# Altium PCB PCB1.PcbDoc (part 3 of 3)
Units mil, origin at the board's own origin, x right, y up, seen from the top; angles counter-clockwise.
Board outline 970.61 x 1495 mil, 4 copper layers (Top Layer, Mid-Layer 1, Mid-Layer 2, Bottom Layer); 18 components, 0 nets, 96 pads, 58 vias.
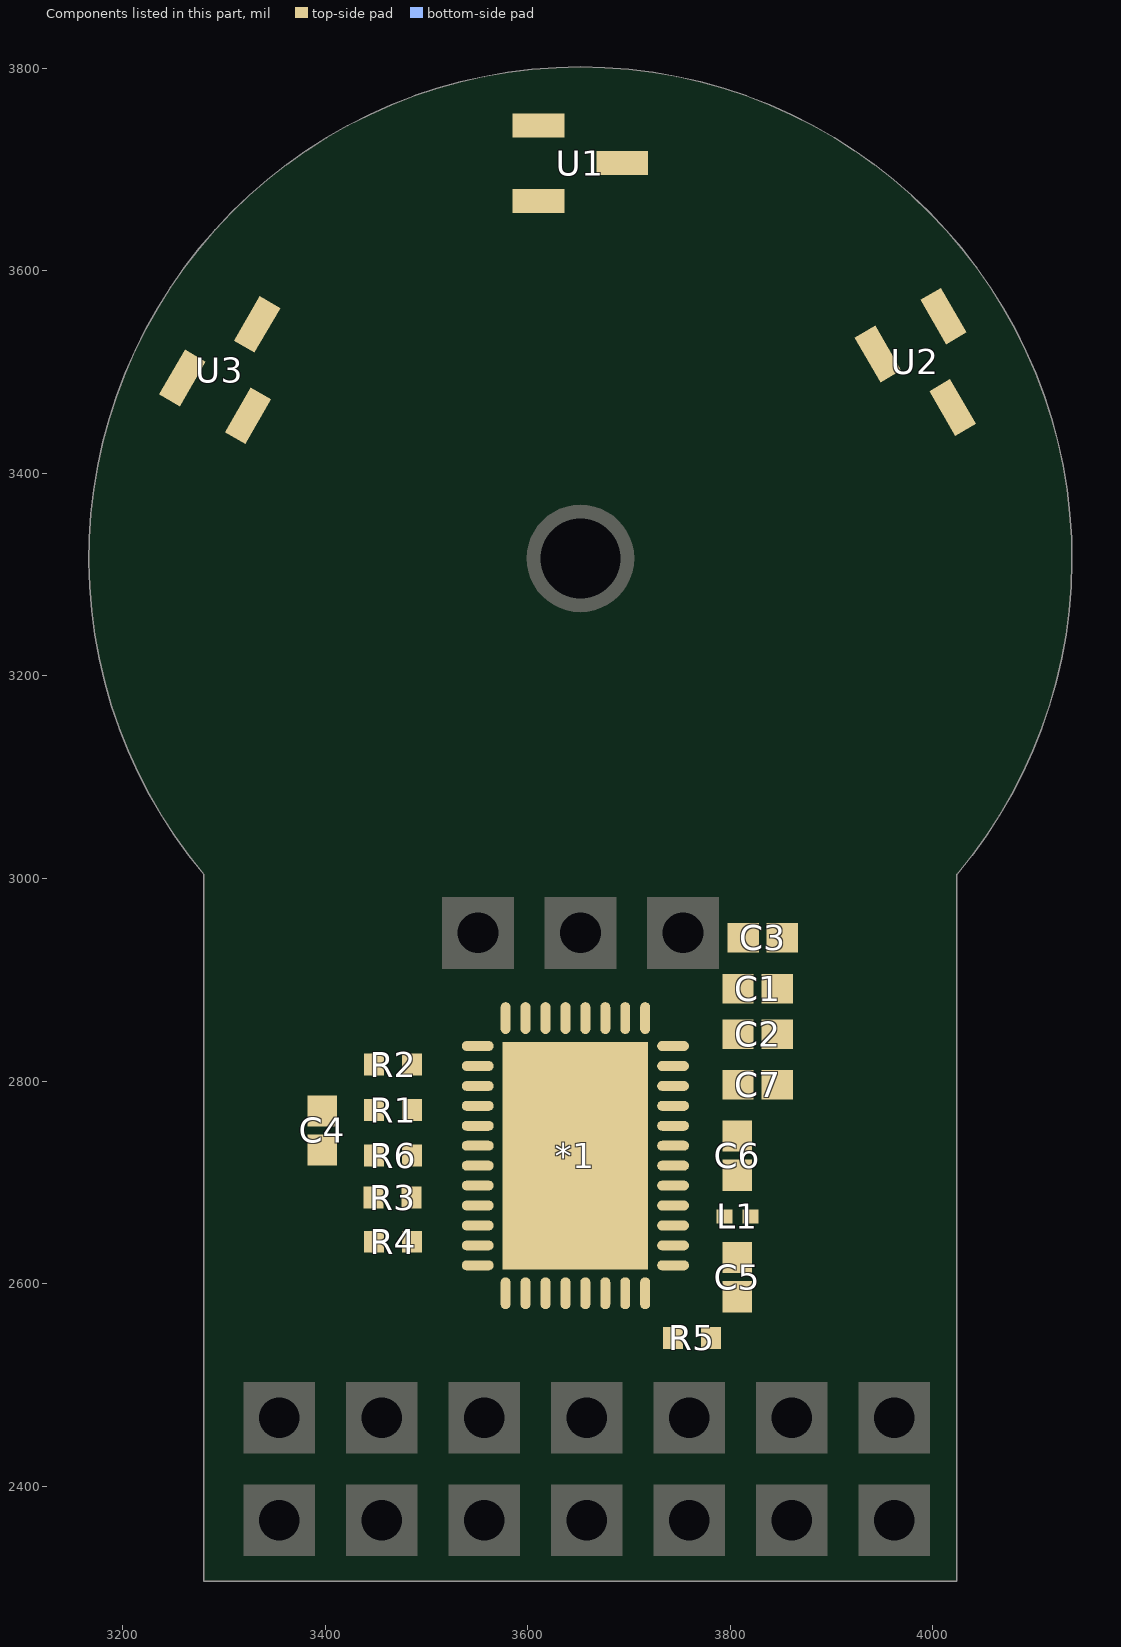
[diagram p5: the components of this part, seen from the top]

## Via types
v1: diameter 15.75, hole 7.87, Top Layer to Bottom Layer, tented both sides, 24 vias
v2: diameter 23.62, hole 11.81, Top Layer to Bottom Layer, tented both sides, 19 vias
v3: diameter 19.68, hole 7.87, Top Layer to Bottom Layer, 15 vias

## Nets (pads, with @x,y where several pads share a name; then routed paths per layer and width w, separated by ;. In a path a pad name is that pad's centre, name@x,y a point inside that pad or via, vN(x,y) a via of type N, cw(c..) or ccw(c..) an arc to the next point about the centre after c; other vN are vias at no path point) (continued)
copper on no net: (continued)
  Mid-Layer 2 w3.94: 3383.65,3202.05 3384.2,3201.32 ; 3384.79,3200 cw(c3461.5,3235.4) 3384.2,3201.32 ; v1(3412.78,3314.17) 3401.3,3294.68 ccw(c3461.5,3235.4) 3384.2,3201.32 ; 3437.71,3476.37 3413.59,3419.15 ccw(c3461.5,3396.51) 3461.5,3343.51 3513.78,3343.51 ccw(c3511.75,3393.62) 3556.55,3371.07 cw(c3652.01,3315.95) 3558.58,3374.45 ccw(c3514.62,3398.59) 3559.03,3421.88 3532.89,3467.16 ccw(c3487,3440.67) 3443.43,3470.84 3421.16,3416.72 ccw(c3461.5,3396.51) 3461.5,3351.39 3511.75,3351.39 ccw(c3511.75,3393.62) 3548.22,3372.32 ; 3437.71,3476.38 cw(c3487,3440.67) 3539.71,3471.1 3565.77,3425.96 cw(c3514.62,3398.59) 3565.25,3370.27 ccw(c3652.01,3315.95) 3563.37,3367.14 ; 3449.32,3166.42 3413.59,3212.76 cw(c3461.5,3235.4) 3461.5,3288.4 3513.78,3288.4 cw(c3511.75,3238.28) 3554.64,3264.29 ccw(c3652.01,3315.95) 3556.55,3260.84 cw(c3514.62,3233.32) 3559.03,3210.02 3532.89,3164.75 cw(c3487,3191.24) 3443.43,3161.07 3405.93,3210.57 cw(c3461.5,3235.4) 3461.5,3296.27 3513.62,3296.27 cw(c3511.75,3238.28) 3561.59,3267.98 ccw(c3652.01,3315.95) 3563.36,3264.77 ; 3449.33,3166.42 ccw(c3487,3191.24) 3526.07,3168.68 3551.2,3212.2 ccw(c3514.62,3233.32) 3551.3,3254.25 ; v1(3478.24,3417.41) 3482.32,3444.01 ; 3482.48,3444.22 cw(c3487,3440.67) 3491.98,3443.54 3517.1,3400.02 cw(c3514.62,3398.59) 3517.08,3397.12 ; v1(3498.58,3227.37) 3503.63,3208.55 3491.98,3188.37 cw(c3487,3191.24) 3482.48,3187.69 3482.15,3188.11 3449.17,3229.61 cw(c3461.5,3235.4) 3461.5,3249.03 3511.75,3249.03 cw(c3511.75,3238.28) 3520.87,3243.96 ; 3514.39,3392.5 cw(c3511.75,3393.62) 3514.26,3392.25 ; 3516.91,3396.87 ccw(c3514.62,3398.59) 3517.08,3397.12 ; 3519.12,3459.52 3544.38,3415.77 cw(c3514.62,3398.59) 3543.59,3380.11 ; 3519.12,3459.53 ccw(c3487,3440.67) 3455.91,3461.18 3435.23,3409.64 ccw(c3461.5,3396.51) 3461.5,3367.14 3511.75,3367.14 ccw(c3511.75,3393.62) 3534.52,3380.08 ; 3521.4,3243 ccw(c3511.75,3238.28) 3520.87,3243.96 ; 3521.4,3388.91 cw(c3511.75,3393.62) 3520.87,3387.95 ; 3523.53,3239.32 cw(c3514.62,3233.32) 3524.09,3238.37 cw(c3514.62,3233.32) 3523.92,3227.95 3498.8,3184.43 cw(c3487,3191.24) 3475.82,3183.46 3442.35,3225.5 cw(c3461.5,3235.4) 3463.21,3256.9 3511.75,3256.9 cw(c3511.75,3238.28) 3527.68,3247.91 ; 3523.53,3392.59 ccw(c3514.62,3398.59) 3524.09,3393.53 ; 3524.09,3238.38 cw(c3652.01,3315.95) 3522.45,3241.15 cw(c3652.01,3315.95) 3520.87,3243.96 ; v1@3525.83,3104.91 cw(c3505.36,3061.94) 3545.07,3088.19 ; 3528.36,3246.68 ccw(c3511.75,3238.28) 3527.68,3247.91 ; 3528.36,3385.23 cw(c3511.75,3393.62) 3527.68,3383.99 ; 3530.19,3243.51 cw(c3514.62,3233.32) 3530.92,3242.3 ; 3530.19,3388.4 ccw(c3514.62,3398.59) 3530.92,3389.61 ; 3535.31,3250.39 ccw(c3511.75,3238.28) 3534.52,3251.83 ; 3535.31,3381.51 cw(c3511.75,3393.62) 3534.52,3380.08 ; 3536.88,3247.67 cw(c3514.62,3233.32) 3537.73,3246.26 ; 3536.88,3384.24 ccw(c3514.62,3398.59) 3537.73,3385.65 ; 3541.36,3255.72 ccw(c3652.01,3315.95) 3542.91,3252.96 ccw(c3652.01,3315.95) 3544.52,3250.25 ; 3541.36,3376.19 cw(c3652.01,3315.95) 3542.91,3378.95 cw(c3652.01,3315.95) 3544.52,3381.66 ; 3542.24,3254.13 ccw(c3511.75,3238.28) 3511.75,3272.65 3461.23,3272.65 ccw(c3461.5,3235.4) 3428.2,3218.73 3462.49,3175.06 ccw(c3487,3191.24) 3512.43,3176.56 3537.56,3220.07 ccw(c3514.62,3233.32) 3537.73,3246.26 ; 3542.24,3377.77 cw(c3511.75,3393.62) 3511.75,3359.26 3461.23,3359.26 cw(c3461.5,3396.51) 3428.2,3413.18 3449.32,3465.49 cw(c3487,3440.67) 3526.07,3463.23 3551.2,3419.71 cw(c3514.62,3398.59) 3551.3,3377.66 ; 3543.59,3251.8 cw(c3514.62,3233.32) 3544.38,3216.14 3519.12,3172.39 cw(c3487,3191.24) 3455.91,3170.73 3421.16,3215.19 cw(c3461.5,3235.4) 3461.5,3280.52 3511.75,3280.52 cw(c3511.75,3238.28) 3548.22,3259.59 ; 3545.08,3088.2 ccw(c3626.52,3110.69) 3617.38,3026.7 ; 3578.6,3269.99 cw(c3652.01,3315.95) 3577,3272.65 ; 3595.08,3348.83 3577,3359.26 ccw(c3514.62,3398.59) 3579.22,3434.17 3569.89,3450.33 3553.35,3478.97 ccw(c3487,3440.67) 3425.69,3486.61 3398.34,3423.62 ccw(c3461.5,3396.51) 3461.5,3327.77 3513.44,3327.77 ccw(c3511.75,3393.62) 3570.18,3363.2 ccw(c3514.62,3398.59) 3572.5,3430.05 3546.53,3475.04 ccw(c3487,3440.67) 3431.93,3481.81 3405.93,3421.34 ccw(c3461.5,3396.51) 3461.5,3335.64 3513.62,3335.64 ccw(c3511.75,3393.62) 3561.59,3363.93 ; 3648.86,3190.01 ccw(c3652.01,3315.95) 3652.01,3189.97 ccw(c3652.01,3315.95) 3655.17,3190.01 ; 3648.86,3441.9 cw(c3652.01,3315.95) 3652.01,3441.94 cw(c3652.01,3315.95) 3655.17,3441.9 ; 3648.92,3402.51 cw(c3652.01,3315.95) 3652.01,3402.57 ; 3649.89,3166.36 ccw(c3649.15,3155.65) 3648.79,3166.38 ; 3649.89,3465.55 cw(c3649.15,3476.26) 3648.79,3465.53 ; 3650.18,3174.23 ccw(c3649.15,3155.65) 3648.77,3174.26 ; 3650.18,3457.67 cw(c3649.15,3476.26) 3648.77,3457.65 ; 3650.44,3182.11 ccw(c3649.15,3155.65) 3648.8,3182.13 ; 3650.44,3449.8 cw(c3649.15,3476.26) 3648.8,3449.77 ; 3650.66,3189.98 ccw(c3649.15,3155.65) 3619.39,3172.83 3594.13,3129.08 ccw(c3626.52,3110.69) 3624.3,3073.51 3679.27,3081.37 ccw(c3677.51,3110.69) 3702.94,3125.38 3677.82,3168.89 ccw(c3654.88,3155.65) 3655.23,3182.13 ccw(c3654.88,3155.65) 3653.59,3182.11 ; 3650.66,3441.93 cw(c3649.15,3476.26) 3619.39,3459.08 3594.13,3502.83 cw(c3626.52,3521.22) 3624.3,3558.4 3680.17,3566.26 cw(c3677.51,3521.22) 3716.58,3498.66 3691.46,3455.14 cw(c3654.88,3476.26) 3655.09,3434.02 ; v1(3652.01,3138.79) 3670.84,3133.75 3682.49,3113.57 cw(c3677.51,3110.69) 3678.33,3105 3677.8,3104.93 3625.37,3097.12 cw(c3626.52,3110.69) 3614.72,3117.5 3639.84,3161.02 cw(c3649.15,3155.65) 3648.79,3166.38 ; v1(3652.01,3493.12) 3633.19,3498.16 3621.54,3518.34 cw(c3626.52,3521.22) 3625.7,3526.91 3626.22,3526.98 3678.66,3534.79 cw(c3677.51,3521.22) 3689.31,3514.41 3664.18,3470.89 cw(c3654.88,3476.26) 3655.24,3465.53 ; 3653.36,3189.98 cw(c3654.88,3155.65) 3684.64,3172.83 3709.9,3129.08 cw(c3677.51,3110.69) 3679.73,3073.51 3623.85,3065.65 cw(c3626.52,3110.69) 3587.44,3133.25 3612.57,3176.77 cw(c3649.15,3155.65) 3648.93,3197.88 ; 3653.36,3441.93 ccw(c3654.88,3476.26) 3684.64,3459.08 3709.9,3502.83 ccw(c3677.51,3521.22) 3679.73,3558.4 3624.75,3550.53 ccw(c3626.52,3521.22) 3601.08,3506.53 3626.21,3463.02 ccw(c3649.15,3476.26) 3648.8,3449.77 ; 3653.59,3449.8 ccw(c3654.88,3476.26) 3655.23,3449.77 ccw(c3654.88,3476.26) 3677.82,3463.02 3702.94,3506.53 ccw(c3677.51,3521.22) 3679.27,3550.53 3625.52,3542.76 ccw(c3626.52,3521.22) 3608.75,3508.99 3633.02,3466.95 ccw(c3649.15,3476.26) 3648.77,3457.65 ; 3653.84,3174.23 cw(c3654.88,3155.65) 3655.25,3174.26 ; 3653.84,3457.67 ccw(c3654.88,3476.26) 3655.25,3457.65 ; 3654.14,3166.36 cw(c3654.88,3155.65) 3655.24,3166.38 ; 3654.14,3465.55 ccw(c3654.88,3476.26) 3655.24,3465.53 ; 3655.11,3229.4 cw(c3652.01,3315.95) 3652.01,3229.34 ; 3655.22,3182.13 cw(c3652.01,3315.95) 3652.01,3182.1 cw(c3652.01,3315.95) 3648.8,3182.13 ; 3655.22,3449.77 ccw(c3652.01,3315.95) 3652.01,3449.81 ccw(c3652.01,3315.95) 3648.8,3449.77 ; 3685.21,3605.35 cw(c3677.51,3521.22) 3686.64,3605.21 ; 3685.61,3605.09 3617.39,3597.29 ; 3687.55,3605.32 3686.64,3605.21 ; 3708.95,3283.08 3727.02,3272.65 cw(c3792.28,3238.28) 3790.79,3312.02 3842.52,3312.02 cw(c3842.52,3235.4) 3912.97,3205.28 3872.09,3150.1 cw(c3817.03,3191.24) 3757.5,3156.87 3731.53,3201.85 cw(c3789.41,3233.32) 3733.84,3268.71 cw(c3792.28,3238.28) 3790.59,3304.14 3842.52,3304.14 cw(c3842.52,3235.4) 3905.69,3208.29 3866.32,3155.53 cw(c3817.03,3191.24) 3764.32,3160.81 3738.26,3205.94 cw(c3789.41,3233.32) 3738.77,3261.64 ; 3725.43,3361.92 cw(c3652.01,3315.95) 3727.02,3359.26 ; 3759.51,3250.25 ccw(c3652.01,3315.95) 3761.12,3252.96 ccw(c3652.01,3315.95) 3762.66,3255.72 ; 3759.51,3381.66 cw(c3652.01,3315.95) 3761.12,3378.95 cw(c3652.01,3315.95) 3762.66,3376.19 ; 3760.44,3251.8 ccw(c3789.41,3233.32) 3759.65,3216.14 3784.91,3172.39 ccw(c3817.03,3191.24) 3848.12,3170.73 3882.86,3215.19 ccw(c3842.52,3235.4) 3842.52,3280.52 3792.28,3280.52 ccw(c3792.28,3238.28) 3755.81,3259.59 ; 3760.44,3380.11 cw(c3789.41,3398.59) 3759.65,3415.77 3784.91,3459.52 cw(c3817.03,3440.67) 3848.12,3461.18 3882.86,3416.72 cw(c3842.52,3396.51) 3842.52,3351.39 3792.28,3351.39 cw(c3792.28,3393.62) 3755.81,3372.32 ; 3761.79,3254.13 cw(c3792.28,3238.28) 3792.28,3272.65 3842.8,3272.65 cw(c3842.52,3235.4) 3875.83,3218.73 3841.54,3175.06 cw(c3817.03,3191.24) 3791.59,3176.56 3766.47,3220.07 cw(c3789.41,3233.32) 3766.3,3246.26 ; 3761.79,3377.77 ccw(c3792.28,3393.62) 3792.28,3359.26 3842.8,3359.26 ccw(c3842.52,3396.51) 3875.83,3413.18 3841.54,3456.85 ccw(c3817.03,3440.67) 3791.59,3455.35 3766.47,3411.84 ccw(c3789.41,3398.59) 3766.3,3385.65 ; 3767.14,3247.67 ccw(c3789.41,3233.32) 3766.3,3246.26 ; 3767.14,3384.24 cw(c3789.41,3398.59) 3766.3,3385.65 ; 3768.72,3250.39 cw(c3792.28,3238.28) 3769.51,3251.83 ; 3768.72,3381.51 ccw(c3792.28,3393.62) 3769.51,3380.08 ; v1(3770.08,3524.03) 3758.95,3543.71 ccw(c3677.51,3521.22) 3686.64,3605.21 ; 3773.83,3243.51 ccw(c3789.41,3233.32) 3773.1,3242.3 ; 3773.83,3388.4 cw(c3789.41,3398.59) 3773.1,3389.61 ; 3775.66,3246.68 cw(c3792.28,3238.28) 3776.35,3247.91 ; 3775.66,3385.23 ccw(c3792.28,3393.62) 3776.35,3383.99 ; 3779.93,3238.38 ccw(c3652.01,3315.95) 3781.58,3241.15 ccw(c3652.01,3315.95) 3783.16,3243.96 ; 3780.5,3239.32 ccw(c3789.41,3233.32) 3779.93,3238.37 ccw(c3789.41,3233.32) 3780.11,3227.95 3805.23,3184.43 ccw(c3817.03,3191.24) 3828.21,3183.46 3861.68,3225.5 ccw(c3842.52,3235.4) 3840.82,3256.9 3792.28,3256.9 ccw(c3792.28,3238.28) 3776.35,3247.91 ; 3780.5,3392.59 cw(c3789.41,3398.59) 3779.93,3393.53 ; 3782.63,3243 cw(c3792.28,3238.28) 3783.16,3243.96 ; 3782.63,3388.91 ccw(c3792.28,3393.62) 3783.16,3387.95 ; v1(3805.44,3227.37) 3800.4,3208.55 3812.05,3188.37 ccw(c3817.03,3191.24) 3821.55,3187.69 3821.87,3188.11 3854.85,3229.61 ccw(c3842.52,3235.4) 3842.52,3249.03 3792.28,3249.03 ccw(c3792.28,3238.28) 3783.16,3243.96 ; v1(3805.44,3404.54) 3800.4,3423.36 3812.05,3443.54 cw(c3817.03,3440.67) 3821.55,3444.22 3821.87,3443.8 3854.85,3402.3 cw(c3842.52,3396.51) 3842.52,3382.88 3792.28,3382.88 cw(c3792.28,3393.62) 3783.16,3387.95 ; v1(3891.24,3317.74) 3902.72,3337.22 ccw(c3842.52,3396.51) 3919.83,3430.59 ; 3919.24,3431.91 cw(c3842.52,3396.51) 3919.83,3430.59 ; 3920.38,3429.86 3919.83,3430.59 ; 3384.2,3201.32 3425.69,3145.3 ccw(c3487,3191.24) 3553.35,3152.94 3569.89,3181.58 3579.22,3197.74 ccw(c3514.62,3233.32) 3577,3272.65 ; 3514.25,3392.23 cw(c3511.75,3393.62) 3511.75,3390.76 3461.5,3390.76 cw(c3461.5,3396.51) 3456.16,3398.63 3456.36,3399.14 3475.82,3448.45 cw(c3487,3440.67) 3498.8,3447.48 3523.92,3403.96 cw(c3514.62,3398.59) 3524.09,3393.53 ; 3514.26,3392.25 3515.63,3394.69 3517.08,3397.12 ; 3520.87,3387.95 cw(c3652.01,3315.95) 3522.45,3390.76 cw(c3652.01,3315.95) 3524.09,3393.53 ; 3520.87,3387.95 cw(c3511.75,3393.62) 3511.75,3382.88 3461.5,3382.88 cw(c3461.5,3396.51) 3449.17,3402.3 3468.84,3452.3 cw(c3487,3440.67) 3506.47,3449.94 3530.74,3407.9 cw(c3514.62,3398.59) 3530.92,3389.61 ; 3527.68,3247.91 ccw(c3652.01,3315.95) 3529.27,3245.09 ccw(c3652.01,3315.95) 3530.92,3242.3 ; 3527.68,3384 cw(c3652.01,3315.95) 3529.27,3386.82 cw(c3652.01,3315.95) 3530.92,3389.61 ; 3527.68,3383.99 cw(c3511.75,3393.62) 3511.75,3375.01 3463.21,3375.01 cw(c3461.5,3396.51) 3442.35,3406.41 3462.49,3456.85 cw(c3487,3440.67) 3512.43,3455.35 3537.56,3411.84 cw(c3514.62,3398.59) 3537.73,3385.65 ; 3530.92,3242.3 cw(c3514.62,3233.32) 3530.74,3224.01 3506.47,3181.97 cw(c3487,3191.24) 3468.84,3179.61 3435.23,3222.27 cw(c3461.5,3235.4) 3461.5,3264.77 3511.75,3264.77 cw(c3511.75,3238.28) 3534.52,3251.83 ; 3534.52,3251.83 ccw(c3652.01,3315.95) 3536.09,3249.03 ccw(c3652.01,3315.95) 3537.73,3246.26 ; 3534.52,3380.08 cw(c3652.01,3315.95) 3536.09,3382.88 cw(c3652.01,3315.95) 3537.73,3385.65 ; 3548.22,3259.59 ccw(c3652.01,3315.95) 3549.16,3257.89 ; 3548.22,3259.59 cw(c3511.75,3238.28) 3549.16,3257.89 ; 3548.22,3372.32 ccw(c3511.75,3393.62) 3549.16,3374.02 ; 3548.22,3372.32 cw(c3652.01,3315.95) 3549.16,3374.02 ; 3549.16,3257.89 ccw(c3652.01,3315.95) 3549.73,3256.9 ccw(c3652.01,3315.95) 3550.3,3255.91 ; 3549.16,3374.02 cw(c3652.01,3315.95) 3549.73,3375.01 cw(c3652.01,3315.95) 3550.3,3376 ; 3550.3,3255.91 ccw(c3652.01,3315.95) 3551.3,3254.25 ; 3550.3,3255.91 cw(c3514.62,3233.32) 3551.3,3254.25 ; 3550.3,3376 ccw(c3514.62,3398.59) 3551.3,3377.66 ; 3550.3,3376 cw(c3652.01,3315.95) 3551.3,3377.66 ; 3561.59,3363.93 ccw(c3511.75,3393.62) 3563.36,3367.14 ; 3561.59,3363.93 cw(c3652.01,3315.95) 3563.36,3367.14 ; 3563.36,3264.77 ccw(c3652.01,3315.95) 3565.25,3261.64 ; 3563.36,3264.77 cw(c3514.62,3233.32) 3565.25,3261.64 ; 3565.25,3261.64 cw(c3514.62,3233.32) 3565.77,3205.95 3539.71,3160.81 cw(c3487,3191.24) 3437.71,3155.53 3398.34,3208.29 cw(c3461.5,3235.4) 3461.5,3304.14 3513.44,3304.14 cw(c3511.75,3238.28) 3570.18,3268.71 cw(c3514.62,3233.32) 3572.5,3201.85 3546.53,3156.87 cw(c3487,3191.24) 3431.94,3150.09 3391.06,3205.28 cw(c3461.5,3235.4) 3461.5,3312.02 3513.24,3312.02 cw(c3511.75,3238.28) 3577,3272.65 ; 3617.38,3026.7 ccw(c3626.52,3110.69) 3618.82,3026.55 cw(c3626.52,3110.69) 3617.38,3026.7 ; 3617.38,3026.7 3616.47,3026.59 3617.38,3026.7 ; 3617.38,3026.7 3686.64,3034.62 ; 3617.38,3026.7 3686.64,3034.62 ; 3617.39,3034.62 cw(c3626.52,3110.69) 3560.17,3149 3576.71,3177.65 3586.03,3193.8 cw(c3649.15,3155.65) 3652.01,3229.34 ; 3617.39,3034.62 3685.61,3042.43 ; 3617.39,3034.62 3685.61,3042.43 ; 3617.38,3597.29 ccw(c3626.52,3521.22) 3560.17,3482.91 3576.71,3454.26 3586.03,3438.11 ccw(c3649.15,3476.26) 3652.01,3402.57 ; 3617.39,3597.29 3686.64,3605.21 ; 3618.42,3042.43 cw(c3626.52,3110.69) 3566.99,3145.06 3592.95,3190.04 cw(c3649.15,3155.65) 3652.01,3221.47 cw(c3654.88,3155.65) 3711.07,3190.04 3737.04,3145.06 cw(c3677.51,3110.69) 3685.62,3042.43 ; 3618.42,3042.43 3683.79,3050.15 ; 3618.42,3042.43 3683.79,3050.15 ; 3648.35,3418.25 cw(c3652.01,3315.95) 3652.01,3418.32 ; 3648.35,3418.25 ccw(c3649.15,3476.26) 3652.01,3418.32 ; 3648.35,3418.25 cw(c3649.15,3476.26) 3599.86,3445.65 3573.81,3490.78 cw(c3626.52,3521.22) 3620.24,3581.76 3685.61,3589.48 cw(c3677.51,3521.22) 3737.04,3486.85 3711.07,3441.87 cw(c3654.88,3476.26) 3652.01,3410.44 cw(c3649.15,3476.26) 3592.96,3441.87 3566.99,3486.85 cw(c3626.52,3521.22) 3618.41,3589.48 3686.64,3597.29 cw(c3677.51,3521.22) 3743.86,3482.91 3727.32,3454.26 3717.99,3438.11 cw(c3654.88,3476.26) 3652.01,3402.57 ; 3648.77,3174.26 ccw(c3652.01,3315.95) 3652.01,3174.22 ccw(c3652.01,3315.95) 3655.25,3174.26 ; 3648.77,3174.26 ccw(c3649.15,3155.65) 3633.02,3164.96 3608.75,3122.92 ccw(c3626.52,3110.69) 3625.52,3089.15 3678.66,3097.12 ccw(c3677.51,3110.69) 3689.31,3117.5 3664.18,3161.02 ccw(c3654.88,3155.65) 3655.24,3166.38 ; 3648.77,3457.65 cw(c3652.01,3315.95) 3652.01,3457.69 cw(c3652.01,3315.95) 3655.25,3457.65 ; 3648.79,3166.38 ccw(c3652.01,3315.95) 3652.01,3166.35 ccw(c3652.01,3315.95) 3655.24,3166.38 ; 3648.8,3182.13 ccw(c3649.15,3155.65) 3626.21,3168.89 3601.08,3125.38 ccw(c3626.52,3110.69) 3624.75,3081.37 3678.51,3089.15 ccw(c3677.51,3110.69) 3695.27,3122.92 3671,3164.96 ccw(c3654.88,3155.65) 3655.25,3174.26 ; 3648.79,3465.53 cw(c3652.01,3315.95) 3652.01,3465.56 cw(c3652.01,3315.95) 3655.24,3465.53 ; 3648.79,3465.53 cw(c3649.15,3476.26) 3639.84,3470.89 3614.72,3514.41 cw(c3626.52,3521.22) 3625.37,3534.79 3678.51,3542.76 cw(c3677.51,3521.22) 3695.27,3508.99 3671,3466.95 cw(c3654.88,3476.26) 3655.25,3457.65 ; 3648.93,3197.88 cw(c3649.15,3155.65) 3650.87,3197.85 ; 3648.93,3197.88 ccw(c3652.01,3315.95) 3650.87,3197.85 ; 3648.93,3434.02 ccw(c3649.15,3476.26) 3650.87,3434.06 ; 3648.93,3434.02 cw(c3649.15,3476.26) 3612.57,3455.14 3587.44,3498.66 cw(c3626.52,3521.22) 3623.85,3566.26 3681.85,3574.03 cw(c3677.51,3521.22) 3723.4,3494.72 3697.26,3449.44 cw(c3654.88,3476.26) 3655.96,3426.12 ccw(c3652.01,3315.95) 3652.01,3426.19 cw(c3649.15,3476.26) 3606.77,3449.44 3580.62,3494.72 cw(c3626.52,3521.22) 3622.17,3574.03 3683.79,3581.76 cw(c3677.51,3521.22) 3730.22,3490.78 3704.16,3445.65 cw(c3654.88,3476.26) 3655.67,3418.25 ccw(c3652.01,3315.95) 3652.01,3418.32 ; 3648.93,3434.02 cw(c3652.01,3315.95) 3650.87,3434.06 ; 3650.87,3197.85 ccw(c3652.01,3315.95) 3652.01,3197.84 ccw(c3652.01,3315.95) 3653.16,3197.85 ; 3650.87,3434.06 cw(c3652.01,3315.95) 3652.01,3434.06 cw(c3652.01,3315.95) 3653.16,3434.06 ; 3652.01,3213.59 cw(c3654.88,3155.65) 3655.67,3213.66 ; 3652.01,3213.59 ccw(c3652.01,3315.95) 3655.67,3213.66 ; 3652.01,3213.59 cw(c3652.01,3315.95) 3648.35,3213.66 ccw(c3649.15,3155.65) 3599.86,3186.26 3573.81,3141.12 ccw(c3626.52,3110.69) 3620.24,3050.15 3681.85,3057.88 ccw(c3677.51,3110.69) 3723.4,3137.19 3697.26,3182.46 ccw(c3654.88,3155.65) 3652.01,3205.72 cw(c3652.01,3315.95) 3648.07,3205.79 ccw(c3649.15,3155.65) 3606.77,3182.47 3580.62,3137.19 ccw(c3626.52,3110.69) 3622.17,3057.88 3680.17,3065.65 ccw(c3677.51,3110.69) 3716.58,3133.25 3691.46,3176.77 ccw(c3654.88,3155.65) 3655.09,3197.88 ; 3652.01,3229.34 cw(c3654.88,3155.65) 3717.99,3193.8 3727.32,3177.65 3743.86,3149 cw(c3677.51,3110.69) 3686.64,3034.62 ; 3653.16,3197.85 cw(c3654.88,3155.65) 3655.09,3197.88 ; 3653.16,3197.85 ccw(c3652.01,3315.95) 3655.09,3197.88 ; 3653.16,3434.06 cw(c3652.01,3315.95) 3655.09,3434.02 ; 3653.16,3434.06 ccw(c3654.88,3476.26) 3655.09,3434.02 ; 3655.67,3213.66 cw(c3654.88,3155.65) 3704.16,3186.26 3730.22,3141.12 cw(c3677.51,3110.69) 3683.79,3050.15 ; 3686.64,3034.62 3618.42,3026.82 3686.64,3034.62 ; 3727.02,3359.26 ccw(c3792.28,3393.62) 3790.79,3319.89 3842.52,3319.89 ccw(c3842.52,3396.51) 3912.97,3426.63 3872.09,3481.81 ccw(c3817.03,3440.67) 3757.5,3475.04 3731.53,3430.06 ccw(c3789.41,3398.59) 3733.84,3363.2 ccw(c3792.28,3393.62) 3790.59,3327.77 3842.52,3327.77 ccw(c3842.52,3396.51) 3905.69,3423.62 3866.32,3476.38 ccw(c3817.03,3440.67) 3764.32,3471.1 3738.26,3425.96 ccw(c3789.41,3398.59) 3738.77,3370.27 ; 3727.02,3359.26 cw(c3789.41,3398.59) 3724.81,3434.17 3734.14,3450.33 3750.68,3478.97 cw(c3817.03,3440.67) 3878.34,3486.61 3919.83,3430.59 ; 3738.77,3261.64 ccw(c3652.01,3315.95) 3740.66,3264.77 ; 3738.77,3261.64 cw(c3789.41,3233.32) 3740.66,3264.77 ; 3738.77,3370.27 ccw(c3789.41,3398.59) 3740.66,3367.14 ; 3738.77,3370.27 cw(c3652.01,3315.95) 3740.66,3367.14 ; 3740.66,3264.77 ccw(c3652.01,3315.95) 3742.43,3267.98 cw(c3792.28,3238.28) 3790.4,3296.27 3842.52,3296.27 cw(c3842.52,3235.4) 3898.09,3210.57 3860.59,3161.07 cw(c3817.03,3191.24) 3771.14,3164.75 3744.99,3210.02 cw(c3789.41,3233.32) 3747.48,3260.84 ccw(c3652.01,3315.95) 3749.39,3264.29 cw(c3792.28,3238.28) 3790.24,3288.4 3842.52,3288.4 cw(c3842.52,3235.4) 3890.44,3212.76 3854.7,3166.42 cw(c3817.03,3191.24) 3777.95,3168.68 3752.83,3212.2 cw(c3789.41,3233.32) 3752.72,3254.25 ; 3740.66,3367.13 cw(c3652.01,3315.95) 3742.43,3363.93 ccw(c3792.28,3393.62) 3790.4,3335.64 3842.52,3335.64 ccw(c3842.52,3396.51) 3898.09,3421.34 3860.59,3470.84 ccw(c3817.03,3440.67) 3771.14,3467.16 3744.99,3421.89 ccw(c3789.41,3398.59) 3747.48,3371.07 cw(c3652.01,3315.95) 3749.39,3367.62 ccw(c3792.28,3393.62) 3790.24,3343.51 3842.52,3343.51 ccw(c3842.52,3396.51) 3890.44,3419.15 3854.7,3465.49 ccw(c3817.03,3440.67) 3777.95,3463.23 3752.83,3419.71 ccw(c3789.41,3398.59) 3752.72,3377.66 ; 3752.72,3254.25 cw(c3789.41,3233.32) 3753.72,3255.91 ; 3752.72,3254.25 ccw(c3652.01,3315.95) 3753.72,3255.91 ; 3752.72,3377.66 ccw(c3789.41,3398.59) 3753.72,3376 ; 3752.72,3377.66 cw(c3652.01,3315.95) 3753.72,3376 ; 3753.72,3255.91 ccw(c3652.01,3315.95) 3754.3,3256.9 ccw(c3652.01,3315.95) 3754.87,3257.89 ; 3753.72,3376 cw(c3652.01,3315.95) 3754.3,3375.01 cw(c3652.01,3315.95) 3754.87,3374.02 ; 3754.87,3257.89 ccw(c3652.01,3315.95) 3755.81,3259.59 ; 3754.87,3257.89 cw(c3792.28,3238.28) 3755.81,3259.59 ; 3754.87,3374.02 ccw(c3792.28,3393.62) 3755.81,3372.32 ; 3754.87,3374.02 cw(c3652.01,3315.95) 3755.81,3372.32 ; 3766.3,3246.26 ccw(c3652.01,3315.95) 3767.94,3249.03 ccw(c3652.01,3315.95) 3769.51,3251.83 ; 3766.3,3385.65 cw(c3652.01,3315.95) 3767.94,3382.88 cw(c3652.01,3315.95) 3769.51,3380.08 ; 3769.51,3251.83 cw(c3792.28,3238.28) 3792.28,3264.77 3842.52,3264.77 cw(c3842.52,3235.4) 3868.8,3222.27 3835.18,3179.61 cw(c3817.03,3191.24) 3797.56,3181.97 3773.29,3224.01 cw(c3789.41,3233.32) 3773.1,3242.3 ; 3769.51,3380.08 ccw(c3792.28,3393.62) 3792.28,3367.14 3842.52,3367.14 ccw(c3842.52,3396.51) 3868.8,3409.64 3835.18,3452.3 ccw(c3817.03,3440.67) 3797.56,3449.94 3773.29,3407.9 ccw(c3789.41,3398.59) 3773.1,3389.61 ; 3773.11,3242.3 ccw(c3652.01,3315.95) 3774.76,3245.09 ccw(c3652.01,3315.95) 3776.34,3247.91 ; 3773.11,3389.61 cw(c3652.01,3315.95) 3774.76,3386.82 cw(c3652.01,3315.95) 3776.34,3384 ; 3776.35,3383.99 ccw(c3792.28,3393.62) 3792.28,3375.01 3840.82,3375.01 ccw(c3842.52,3396.51) 3861.68,3406.41 3828.21,3448.45 ccw(c3817.03,3440.67) 3805.23,3447.48 3780.11,3403.96 ccw(c3789.41,3398.59) 3779.93,3393.53 ; 3779.93,3393.53 cw(c3652.01,3315.95) 3781.58,3390.76 cw(c3652.01,3315.95) 3783.16,3387.95
  Mid-Layer 2 w10: 3354.65,2366.27 3402.01,2413.64 3402.01,2566.27 3422.01,2586.27 3422.01,2761.27 3482.01,2821.27 v2(3522.01,2821.27) ; 3455.83,2366.27 3507.01,2417.46 3507.01,2536.27 3442.01,2601.27 3442.01,2736.27 3497.01,2791.27 v2(3522.01,2791.27) ; v2(3522.01,2861.27) 3567.01,2816.27 3567.01,2546.27 3607.01,2506.27 3607.01,2416.27 3557.01,2366.27 ; v2(3722.01,2561.27) 3787.01,2561.27 3812.01,2536.27 3812.01,2411.27 3857.01,2366.27 3860.56,2366.27
  Mid-Layer 2 w11.81: 3596.77,3347.85 cw(c3652.01,3315.95) 3707.25,3284.06
  Bottom Layer w3.94: v1(3412.78,3314.17) 3428.42,3312.02 3513.24,3312.02 cw(c3511.75,3238.28) 3577,3272.65 ; 3417.98,3489.4 cw(c3487,3440.67) 3418.82,3490.57 ; 3419.19,3491.41 3418.82,3490.57 ; 3437.71,3476.37 3413.59,3419.15 ccw(c3461.5,3396.51) 3461.5,3343.51 3513.78,3343.51 ccw(c3511.75,3393.62) 3556.55,3371.07 cw(c3652.01,3315.95) 3558.58,3374.45 ccw(c3514.62,3398.59) 3559.03,3421.88 3532.89,3467.16 ccw(c3487,3440.67) 3443.43,3470.84 3421.16,3416.72 ccw(c3461.5,3396.51) 3461.5,3351.39 3511.75,3351.39 ccw(c3511.75,3393.62) 3548.22,3372.32 ; 3437.71,3476.38 cw(c3487,3440.67) 3539.71,3471.1 3565.77,3425.96 cw(c3514.62,3398.59) 3565.25,3370.27 ccw(c3652.01,3315.95) 3563.37,3367.14 ; v1(3477.26,3216.19) 3482.48,3187.69 ccw(c3487,3191.24) 3491.98,3188.37 3517.1,3231.88 ccw(c3514.62,3233.32) 3517.08,3234.79 ; v1(3498.58,3404.54) 3484.8,3390.76 3461.5,3390.76 cw(c3461.5,3396.51) 3456.17,3398.64 3456.36,3399.14 3475.82,3448.45 cw(c3487,3440.67) 3498.8,3447.48 3523.92,3403.96 cw(c3514.62,3398.59) 3524.09,3393.53 ; 3514.39,3239.41 ccw(c3511.75,3238.28) 3514.25,3239.68 ; 3516.91,3235.04 cw(c3514.62,3233.32) 3517.08,3234.79 ; 3521.4,3243 ccw(c3511.75,3238.28) 3520.87,3243.96 ; 3521.4,3388.91 cw(c3511.75,3393.62) 3520.87,3387.95 ; 3523.53,3239.32 cw(c3514.62,3233.32) 3524.09,3238.37 cw(c3514.62,3233.32) 3523.92,3227.95 3498.8,3184.43 cw(c3487,3191.24) 3475.82,3183.46 3456.36,3232.77 3456.17,3233.27 cw(c3461.5,3235.4) 3461.5,3241.15 3511.75,3241.15 cw(c3511.75,3238.28) 3514.25,3239.68 ; 3523.53,3392.59 ccw(c3514.62,3398.59) 3524.09,3393.53 ; 3524.09,3238.38 cw(c3652.01,3315.95) 3522.45,3241.15 cw(c3652.01,3315.95) 3520.87,3243.96 ; 3528.36,3246.68 ccw(c3511.75,3238.28) 3527.68,3247.91 ; 3528.36,3385.23 cw(c3511.75,3393.62) 3527.68,3383.99 ; 3530.19,3243.51 cw(c3514.62,3233.32) 3530.92,3242.3 ; 3530.19,3388.4 ccw(c3514.62,3398.59) 3530.92,3389.61 ; v1(3530.85,3522.24) 3508.24,3522.44 ccw(c3487,3440.67) 3418.82,3490.57 ; 3535.31,3250.39 ccw(c3511.75,3238.28) 3534.52,3251.83 ; 3535.31,3381.51 cw(c3511.75,3393.62) 3534.52,3380.08 ; 3536.88,3247.67 cw(c3514.62,3233.32) 3537.73,3246.26 ; 3536.88,3384.24 ccw(c3514.62,3398.59) 3537.73,3385.65 ; 3541.36,3255.72 ccw(c3652.01,3315.95) 3542.91,3252.96 ccw(c3652.01,3315.95) 3544.52,3250.25 ; 3541.36,3376.19 cw(c3652.01,3315.95) 3542.91,3378.95 cw(c3652.01,3315.95) 3544.52,3381.66 ; 3542.24,3254.13 ccw(c3511.75,3238.28) 3511.75,3272.65 3461.23,3272.65 ccw(c3461.5,3235.4) 3428.2,3218.73 3449.32,3166.42 ccw(c3487,3191.24) 3526.07,3168.68 3551.2,3212.2 ccw(c3514.62,3233.32) 3551.3,3254.25 ; 3542.24,3377.77 cw(c3511.75,3393.62) 3511.75,3359.26 3461.23,3359.26 cw(c3461.5,3396.51) 3428.2,3413.18 3449.32,3465.49 cw(c3487,3440.67) 3526.07,3463.23 3551.2,3419.71 cw(c3514.62,3398.59) 3551.3,3377.66 ; 3543.59,3251.8 cw(c3514.62,3233.32) 3544.38,3216.14 3519.12,3172.39 cw(c3487,3191.24) 3455.91,3170.73 3435.23,3222.27 cw(c3461.5,3235.4) 3461.5,3264.77 3511.75,3264.77 cw(c3511.75,3238.28) 3534.52,3251.83 ; 3543.59,3380.11 ccw(c3514.62,3398.59) 3544.38,3415.77 3519.12,3459.52 ccw(c3487,3440.67) 3455.91,3461.18 3435.23,3409.64 ccw(c3461.5,3396.51) 3461.5,3367.14 3511.75,3367.14 ccw(c3511.75,3393.62) 3534.52,3380.08 ; 3575.5,3275.36 ccw(c3652.01,3315.95) 3577,3272.65 ; 3575.5,3356.55 cw(c3652.01,3315.95) 3577,3359.26 ; 3648.86,3190.01 ccw(c3652.01,3315.95) 3652.01,3189.97 ccw(c3652.01,3315.95) 3655.17,3190.01 ; 3648.86,3441.9 cw(c3652.01,3315.95) 3652.01,3441.94 cw(c3652.01,3315.95) 3655.17,3441.9 ; 3649.49,3473.41 cw(c3649.15,3476.26) 3649.2,3473.39 ; 3649.89,3166.36 ccw(c3649.15,3155.65) 3648.79,3166.38 ; 3649.89,3465.55 cw(c3649.15,3476.26) 3648.79,3465.53 ; 3650.18,3174.23 ccw(c3649.15,3155.65) 3648.77,3174.26 ; 3650.18,3457.67 cw(c3649.15,3476.26) 3648.77,3457.65 ; 3650.44,3182.11 ccw(c3649.15,3155.65) 3648.8,3182.13 ; 3650.44,3449.8 cw(c3649.15,3476.26) 3648.8,3449.77 ; 3650.66,3189.98 ccw(c3649.15,3155.65) 3619.39,3172.83 3594.13,3129.08 ccw(c3626.52,3110.69) 3624.3,3073.51 3680.17,3065.65 ccw(c3677.51,3110.69) 3716.58,3133.25 3691.46,3176.77 ccw(c3654.88,3155.65) 3655.09,3197.88 ; 3650.66,3441.93 cw(c3649.15,3476.26) 3619.39,3459.08 3594.13,3502.83 cw(c3626.52,3521.22) 3624.3,3558.4 3680.17,3566.26 cw(c3677.51,3521.22) 3716.58,3498.66 3691.46,3455.14 cw(c3654.88,3476.26) 3655.09,3434.02 ; v1(3652.01,3138.79) 3633.19,3133.75 3621.54,3113.57 ccw(c3626.52,3110.69) 3625.7,3105 3626.22,3104.93 3678.66,3097.12 ccw(c3677.51,3110.69) 3689.31,3117.5 3664.18,3161.02 ccw(c3654.88,3155.65) 3655.24,3166.38 ; 3652.01,3250.21 3652.01,3229.34 cw(c3654.88,3155.65) 3717.99,3193.8 3727.32,3177.65 3743.86,3149 cw(c3677.51,3110.69) 3686.64,3034.62 ; 3652.01,3381.7 3652.01,3402.57 ccw(c3654.88,3476.26) 3717.99,3438.11 3727.32,3454.26 3743.86,3482.91 ccw(c3677.51,3521.22) 3686.64,3597.29 3618.42,3589.48 ccw(c3626.52,3521.22) 3566.99,3486.85 3592.95,3441.87 ccw(c3649.15,3476.26) 3652.01,3410.44 ccw(c3654.88,3476.26) 3711.07,3441.87 3737.04,3486.85 ccw(c3677.51,3521.22) 3685.61,3589.48 3620.24,3581.76 ccw(c3626.52,3521.22) 3573.81,3490.78 3599.86,3445.65 ccw(c3649.15,3476.26) 3648.35,3418.25 ; v1(3652.99,3517.18) 3678.06,3526.95 ; 3653.36,3189.98 cw(c3654.88,3155.65) 3684.64,3172.83 3709.9,3129.08 cw(c3677.51,3110.69) 3679.73,3073.51 3624.75,3081.37 cw(c3626.52,3110.69) 3601.08,3125.38 3626.21,3168.89 cw(c3649.15,3155.65) 3648.8,3182.13 ; 3653.36,3441.93 ccw(c3654.88,3476.26) 3684.64,3459.08 3709.9,3502.83 ccw(c3677.51,3521.22) 3679.73,3558.4 3624.75,3550.53 ccw(c3626.52,3521.22) 3601.08,3506.53 3626.21,3463.02 ccw(c3649.15,3476.26) 3648.8,3449.77 ; 3653.59,3182.11 cw(c3654.88,3155.65) 3655.23,3182.13 cw(c3654.88,3155.65) 3677.82,3168.89 3702.94,3125.38 cw(c3677.51,3110.69) 3679.27,3081.37 3625.52,3089.15 cw(c3626.52,3110.69) 3608.75,3122.92 3633.02,3164.96 cw(c3649.15,3155.65) 3648.77,3174.26 ; 3653.59,3449.8 ccw(c3654.88,3476.26) 3655.23,3449.77 ccw(c3654.88,3476.26) 3677.82,3463.02 3702.94,3506.53 ccw(c3677.51,3521.22) 3679.27,3550.53 3625.52,3542.76 ccw(c3626.52,3521.22) 3608.75,3508.99 3633.02,3466.95 ccw(c3649.15,3476.26) 3648.77,3457.65 ; 3653.84,3174.23 cw(c3654.88,3155.65) 3655.25,3174.26 ; 3653.84,3457.67 ccw(c3654.88,3476.26) 3655.25,3457.65 ; 3654.14,3166.36 cw(c3654.88,3155.65) 3655.24,3166.38 ; 3654.14,3465.55 ccw(c3654.88,3476.26) 3655.24,3465.53 ; 3654.54,3473.41 ccw(c3654.88,3476.26) 3654.83,3473.39 ; 3655.22,3182.13 cw(c3652.01,3315.95) 3652.01,3182.1 cw(c3652.01,3315.95) 3648.8,3182.13 ; 3655.22,3449.77 ccw(c3652.01,3315.95) 3652.01,3449.81 ccw(c3652.01,3315.95) 3648.8,3449.77 ; 3678.33,3526.91 cw(c3677.51,3521.22) 3682.49,3518.34 3657.36,3474.83 cw(c3654.88,3476.26) 3654.84,3473.39 ; 3728.52,3275.36 cw(c3652.01,3315.95) 3727.02,3272.65 ; 3728.52,3356.55 ccw(c3652.01,3315.95) 3727.02,3359.26 ; 3759.51,3250.25 ccw(c3652.01,3315.95) 3761.12,3252.96 ccw(c3652.01,3315.95) 3762.66,3255.72 ; 3759.51,3381.66 cw(c3652.01,3315.95) 3761.12,3378.95 cw(c3652.01,3315.95) 3762.66,3376.19 ; 3760.44,3251.8 ccw(c3789.41,3233.32) 3759.65,3216.14 3784.91,3172.39 ccw(c3817.03,3191.24) 3848.12,3170.73 3868.8,3222.27 ccw(c3842.52,3235.4) 3842.52,3264.77 3792.28,3264.77 ccw(c3792.28,3238.28) 3769.51,3251.83 ; 3760.44,3380.11 cw(c3789.41,3398.59) 3759.65,3415.77 3784.91,3459.52 cw(c3817.03,3440.67) 3848.12,3461.18 3868.8,3409.64 cw(c3842.52,3396.51) 3842.52,3367.14 3792.28,3367.14 cw(c3792.28,3393.62) 3769.51,3380.08 ; 3761.79,3254.13 cw(c3792.28,3238.28) 3792.28,3272.65 3842.8,3272.65 cw(c3842.52,3235.4) 3875.83,3218.73 3854.7,3166.42 cw(c3817.03,3191.24) 3777.95,3168.68 3752.83,3212.2 cw(c3789.41,3233.32) 3752.72,3254.25 ; 3761.79,3377.77 ccw(c3792.28,3393.62) 3792.28,3359.26 3842.8,3359.26 ccw(c3842.52,3396.51) 3875.83,3413.18 3854.7,3465.49 ccw(c3817.03,3440.67) 3777.95,3463.23 3752.83,3419.71 ccw(c3789.41,3398.59) 3752.72,3377.66 ; 3767.14,3247.67 ccw(c3789.41,3233.32) 3766.3,3246.26 ; 3767.14,3384.24 cw(c3789.41,3398.59) 3766.3,3385.65 ; v1(3768.59,3113.4) 3795.79,3109.47 ccw(c3817.03,3191.24) 3885.2,3141.34 ; 3768.72,3250.39 cw(c3792.28,3238.28) 3769.51,3251.83 ; 3768.72,3381.51 ccw(c3792.28,3393.62) 3769.51,3380.08 ; 3773.83,3243.51 ccw(c3789.41,3233.32) 3773.1,3242.3 ; 3773.83,3388.4 cw(c3789.41,3398.59) 3773.1,3389.61 ; 3775.66,3246.68 cw(c3792.28,3238.28) 3776.35,3247.91 ; 3775.66,3385.23 ccw(c3792.28,3393.62) 3776.35,3383.99 ; 3779.93,3238.38 ccw(c3652.01,3315.95) 3781.58,3241.15 ccw(c3652.01,3315.95) 3783.16,3243.96 ; 3780.5,3239.32 ccw(c3789.41,3233.32) 3779.93,3238.37 ccw(c3789.41,3233.32) 3780.11,3227.95 3805.23,3184.43 ccw(c3817.03,3191.24) 3828.21,3183.46 3847.66,3232.77 3847.86,3233.27 ccw(c3842.52,3235.4) 3842.52,3241.15 3819.22,3241.15 v1(3805.44,3227.37) ; 3782.63,3243 cw(c3792.28,3238.28) 3783.16,3243.96 ; 3782.63,3388.91 ccw(c3792.28,3393.62) 3783.16,3387.95 ; 3787.12,3396.87 cw(c3789.41,3398.59) 3786.95,3397.12 ; 3789.64,3392.5 ccw(c3792.28,3393.62) 3789.77,3392.23 ; 3821.55,3444.22 ccw(c3817.03,3440.67) 3812.05,3443.54 3786.93,3400.02 ccw(c3789.41,3398.59) 3786.95,3397.12 ; 3821.87,3443.8 v1(3826.77,3415.72) ; 3866.32,3476.37 3890.43,3419.15 cw(c3842.52,3396.51) 3842.52,3343.51 3790.24,3343.51 cw(c3792.28,3393.62) 3747.48,3371.07 ccw(c3652.01,3315.95) 3745.45,3374.45 cw(c3789.41,3398.59) 3744.99,3421.88 3771.14,3467.16 cw(c3817.03,3440.67) 3860.59,3470.84 3882.86,3416.72 cw(c3842.52,3396.51) 3842.52,3351.39 3792.28,3351.39 cw(c3792.28,3393.62) 3755.81,3372.32 ; 3866.32,3476.38 ccw(c3817.03,3440.67) 3764.32,3471.1 3738.26,3425.96 ccw(c3789.41,3398.59) 3738.77,3370.27 cw(c3652.01,3315.95) 3740.66,3367.14 ; 3884.84,3140.49 3885.2,3141.34 ; 3886.04,3142.51 cw(c3817.03,3191.24) 3885.2,3141.34 ; v1(3891.24,3317.74) 3878.34,3319.89 3790.79,3319.89 cw(c3792.28,3393.62) 3727.02,3359.26 ; 3418.82,3490.57 3391.06,3426.63 ccw(c3461.5,3396.51) 3461.5,3319.89 3513.24,3319.89 ccw(c3511.75,3393.62) 3577,3359.26 ; 3514.25,3239.68 3515.63,3237.21 3517.08,3234.79 ; 3520.87,3243.96 ccw(c3511.75,3238.28) 3511.75,3249.03 3461.5,3249.03 ccw(c3461.5,3235.4) 3449.17,3229.61 3468.84,3179.61 ccw(c3487,3191.24) 3506.47,3181.97 3530.74,3224.01 ccw(c3514.62,3233.32) 3530.92,3242.3 ; 3520.87,3387.95 cw(c3652.01,3315.95) 3522.45,3390.76 cw(c3652.01,3315.95) 3524.09,3393.53 ; 3520.87,3387.95 cw(c3511.75,3393.62) 3511.75,3382.88 3461.5,3382.88 cw(c3461.5,3396.51) 3449.17,3402.3 3468.84,3452.3 cw(c3487,3440.67) 3506.47,3449.94 3530.74,3407.9 cw(c3514.62,3398.59) 3530.92,3389.61 ; 3527.68,3247.91 ccw(c3652.01,3315.95) 3529.27,3245.09 ccw(c3652.01,3315.95) 3530.92,3242.3 ; 3527.68,3247.91 ccw(c3511.75,3238.28) 3511.75,3256.9 3463.21,3256.9 ccw(c3461.5,3235.4) 3442.35,3225.5 3462.49,3175.06 ccw(c3487,3191.24) 3512.43,3176.56 3537.56,3220.07 ccw(c3514.62,3233.32) 3537.73,3246.26 ; 3527.68,3384 cw(c3652.01,3315.95) 3529.27,3386.82 cw(c3652.01,3315.95) 3530.92,3389.61 ; 3527.68,3383.99 cw(c3511.75,3393.62) 3511.75,3375.01 3463.21,3375.01 cw(c3461.5,3396.51) 3442.35,3406.41 3462.49,3456.85 cw(c3487,3440.67) 3512.43,3455.35 3537.56,3411.84 cw(c3514.62,3398.59) 3537.73,3385.65 ; 3534.52,3251.83 ccw(c3652.01,3315.95) 3536.09,3249.03 ccw(c3652.01,3315.95) 3537.73,3246.26 ; 3534.52,3380.08 cw(c3652.01,3315.95) 3536.09,3382.88 cw(c3652.01,3315.95) 3537.73,3385.65 ; 3548.22,3259.59 ccw(c3652.01,3315.95) 3549.16,3257.89 ; 3548.22,3259.59 cw(c3511.75,3238.28) 3549.16,3257.89 ; 3548.22,3259.59 ccw(c3511.75,3238.28) 3511.75,3280.52 3461.5,3280.52 ccw(c3461.5,3235.4) 3421.16,3215.19 3443.43,3161.07 ccw(c3487,3191.24) 3532.89,3164.75 3559.03,3210.02 ccw(c3514.62,3233.32) 3558.58,3257.46 cw(c3652.01,3315.95) 3556.55,3260.84 ccw(c3511.75,3238.28) 3513.78,3288.4 3461.5,3288.4 ccw(c3461.5,3235.4) 3413.59,3212.76 3437.71,3155.53 ccw(c3487,3191.24) 3539.71,3160.81 3565.77,3205.94 ccw(c3514.62,3233.32) 3565.25,3261.64 cw(c3652.01,3315.95) 3563.37,3264.77 ; 3548.22,3372.32 ccw(c3511.75,3393.62) 3549.16,3374.02 ; 3548.22,3372.32 cw(c3652.01,3315.95) 3549.16,3374.02 ; 3549.16,3257.89 ccw(c3652.01,3315.95) 3549.73,3256.9 ccw(c3652.01,3315.95) 3550.3,3255.91 ; 3549.16,3374.02 cw(c3652.01,3315.95) 3549.73,3375.01 cw(c3652.01,3315.95) 3550.3,3376 ; 3550.3,3255.91 ccw(c3652.01,3315.95) 3551.3,3254.25 ; 3550.3,3255.91 cw(c3514.62,3233.32) 3551.3,3254.25 ; 3550.3,3376 ccw(c3514.62,3398.59) 3551.3,3377.66 ; 3550.3,3376 cw(c3652.01,3315.95) 3551.3,3377.66 ; 3561.59,3267.98 ccw(c3511.75,3238.28) 3513.62,3296.27 3461.5,3296.27 ccw(c3461.5,3235.4) 3405.93,3210.57 3431.93,3150.1 ccw(c3487,3191.24) 3546.53,3156.87 3572.5,3201.85 ccw(c3514.62,3233.32) 3570.18,3268.71 ccw(c3511.75,3238.28) 3513.44,3304.14 3461.5,3304.14 ccw(c3461.5,3235.4) 3398.34,3208.29 3425.69,3145.3 ccw(c3487,3191.24) 3553.35,3152.94 3569.89,3181.58 3579.22,3197.74 ccw(c3514.62,3233.32) 3577,3272.65 ; 3561.59,3267.98 cw(c3511.75,3238.28) 3563.36,3264.77 ; 3561.59,3267.98 ccw(c3652.01,3315.95) 3563.36,3264.77 ; 3561.59,3363.93 cw(c3652.01,3315.95) 3563.36,3367.14 ; 3561.59,3363.93 ccw(c3511.75,3393.62) 3563.36,3367.14 ; 3561.59,3363.93 cw(c3511.75,3393.62) 3513.62,3335.64 3461.5,3335.64 cw(c3461.5,3396.51) 3405.93,3421.34 3431.93,3481.81 cw(c3487,3440.67) 3546.53,3475.04 3572.5,3430.06 cw(c3514.62,3398.59) 3570.18,3363.2 cw(c3511.75,3393.62) 3513.44,3327.77 3461.5,3327.77 cw(c3461.5,3396.51) 3398.34,3423.62 3425.69,3486.61 cw(c3487,3440.67) 3553.35,3478.97 3569.89,3450.33 3579.22,3434.17 cw(c3514.62,3398.59) 3577,3359.26 ; 3618.41,3042.43 cw(c3626.52,3110.69) 3566.99,3145.06 3592.95,3190.04 cw(c3649.15,3155.65) 3652.01,3221.47 cw(c3654.88,3155.65) 3711.07,3190.04 3737.04,3145.06 cw(c3677.51,3110.69) 3685.61,3042.43 ; 3618.42,3042.43 3686.64,3034.62 ; 3618.42,3042.43 3686.64,3034.62 ; 3620.24,3050.15 cw(c3626.52,3110.69) 3573.81,3141.12 3599.86,3186.26 cw(c3649.15,3155.65) 3648.35,3213.66 ; 3620.24,3050.15 3685.61,3042.43 ; 3620.24,3050.15 3685.61,3042.43 ; 3648.35,3213.66 cw(c3649.15,3155.65) 3652.01,3213.59 ; 3648.35,3213.66 ccw(c3652.01,3315.95) 3652.01,3213.59 ; 3648.35,3418.25 cw(c3652.01,3315.95) 3652.01,3418.32 ; 3648.35,3418.25 ccw(c3649.15,3476.26) 3652.01,3418.32 ; 3648.77,3174.26 ccw(c3652.01,3315.95) 3652.01,3174.22 ccw(c3652.01,3315.95) 3655.25,3174.26 ; 3648.77,3457.65 cw(c3652.01,3315.95) 3652.01,3457.69 cw(c3652.01,3315.95) 3655.25,3457.65 ; 3648.79,3166.38 ccw(c3652.01,3315.95) 3652.01,3166.35 ccw(c3652.01,3315.95) 3655.24,3166.38 ; 3648.79,3166.38 ccw(c3649.15,3155.65) 3639.84,3161.02 3614.72,3117.5 ccw(c3626.52,3110.69) 3625.37,3097.12 3678.51,3089.15 ccw(c3677.51,3110.69) 3695.27,3122.92 3671,3164.96 ccw(c3654.88,3155.65) 3655.25,3174.26 ; 3648.79,3465.53 cw(c3652.01,3315.95) 3652.01,3465.56 cw(c3652.01,3315.95) 3655.24,3465.53 ; 3648.79,3465.53 cw(c3649.15,3476.26) 3639.84,3470.89 3614.72,3514.41 cw(c3626.52,3521.22) 3625.37,3534.79 3678.51,3542.76 cw(c3677.51,3521.22) 3695.27,3508.99 3671,3466.95 cw(c3654.88,3476.26) 3655.25,3457.65 ; 3648.93,3197.88 cw(c3649.15,3155.65) 3650.87,3197.85 ; 3648.93,3197.88 ccw(c3652.01,3315.95) 3650.87,3197.85 ; 3648.93,3197.88 ccw(c3649.15,3155.65) 3612.57,3176.77 3587.44,3133.25 ccw(c3626.52,3110.69) 3623.85,3065.65 3681.85,3057.88 ccw(c3677.51,3110.69) 3723.4,3137.19 3697.26,3182.46 ccw(c3654.88,3155.65) 3655.96,3205.79 cw(c3652.01,3315.95) 3652.01,3205.72 ccw(c3649.15,3155.65) 3606.77,3182.47 3580.62,3137.19 ccw(c3626.52,3110.69) 3622.17,3057.88 3683.79,3050.15 ccw(c3677.51,3110.69) 3730.22,3141.12 3704.16,3186.26 ccw(c3654.88,3155.65) 3655.67,3213.66 cw(c3652.01,3315.95) 3652.01,3213.59 ; 3648.93,3434.02 ccw(c3649.15,3476.26) 3650.87,3434.06 ; 3648.93,3434.02 cw(c3649.15,3476.26) 3612.57,3455.14 3587.44,3498.66 cw(c3626.52,3521.22) 3623.85,3566.26 3681.85,3574.03 cw(c3677.51,3521.22) 3723.4,3494.72 3697.26,3449.44 cw(c3654.88,3476.26) 3655.96,3426.12 ccw(c3652.01,3315.95) 3652.01,3426.19 cw(c3649.15,3476.26) 3606.77,3449.44 3580.62,3494.72 cw(c3626.52,3521.22) 3622.17,3574.03 3683.79,3581.76 cw(c3677.51,3521.22) 3730.22,3490.78 3704.16,3445.65 cw(c3654.88,3476.26) 3655.67,3418.25 ccw(c3652.01,3315.95) 3652.01,3418.32 ; 3648.93,3434.02 cw(c3652.01,3315.95) 3650.87,3434.06 ; 3649.18,3473.39 cw(c3649.15,3476.26) 3646.66,3474.83 3621.54,3518.34 cw(c3626.52,3521.22) 3625.7,3526.91 3626.22,3526.98 3678.66,3534.79 cw(c3677.51,3521.22) 3689.31,3514.41 3664.18,3470.89 cw(c3654.88,3476.26) 3655.24,3465.53 ; 3649.2,3473.39 3652.01,3473.43 3654.83,3473.39 ; 3650.87,3197.85 ccw(c3652.01,3315.95) 3652.01,3197.84 ccw(c3652.01,3315.95) 3653.16,3197.85 ; 3650.87,3434.06 cw(c3652.01,3315.95) 3652.01,3434.06 cw(c3652.01,3315.95) 3653.16,3434.06 ; 3653.16,3197.85 cw(c3654.88,3155.65) 3655.09,3197.88 ; 3653.16,3197.85 ccw(c3652.01,3315.95) 3655.09,3197.88 ; 3653.16,3434.06 cw(c3652.01,3315.95) 3655.09,3434.02 ; 3653.16,3434.06 ccw(c3654.88,3476.26) 3655.09,3434.02 ; 3727.02,3272.65 cw(c3792.28,3238.28) 3790.79,3312.02 3842.52,3312.02 cw(c3842.52,3235.4) 3912.97,3205.28 3885.2,3141.34 ; 3727.02,3272.65 ccw(c3789.41,3233.32) 3724.81,3197.74 3734.14,3181.58 3750.68,3152.94 ccw(c3817.03,3191.24) 3878.34,3145.3 3905.69,3208.29 ccw(c3842.52,3235.4) 3842.52,3304.14 3790.59,3304.14 ccw(c3792.28,3238.28) 3733.84,3268.71 ccw(c3789.41,3233.32) 3731.53,3201.85 3757.5,3156.87 ccw(c3817.03,3191.24) 3872.09,3150.1 3898.09,3210.57 ccw(c3842.52,3235.4) 3842.52,3296.27 3790.41,3296.27 ccw(c3792.28,3238.28) 3742.44,3267.98 ; 3727.02,3359.26 cw(c3789.41,3398.59) 3724.81,3434.17 3734.14,3450.33 3750.68,3478.97 cw(c3817.03,3440.67) 3878.34,3486.61 3905.69,3423.62 cw(c3842.52,3396.51) 3842.52,3327.77 3790.59,3327.77 cw(c3792.28,3393.62) 3733.84,3363.2 cw(c3789.41,3398.59) 3731.53,3430.06 3757.5,3475.04 cw(c3817.03,3440.67) 3872.09,3481.81 3898.09,3421.34 cw(c3842.52,3396.51) 3842.52,3335.64 3790.41,3335.64 cw(c3792.28,3393.62) 3742.44,3363.93 ; 3740.66,3264.77 cw(c3792.28,3238.28) 3742.44,3267.98 ; 3740.66,3264.77 ccw(c3652.01,3315.95) 3742.43,3267.98 ; 3740.66,3264.77 cw(c3652.01,3315.95) 3738.77,3261.64 ccw(c3789.41,3233.32) 3738.26,3205.95 3764.32,3160.81 ccw(c3817.03,3191.24) 3866.32,3155.53 3890.43,3212.76 ccw(c3842.52,3235.4) 3842.52,3288.4 3790.24,3288.4 ccw(c3792.28,3238.28) 3747.48,3260.84 cw(c3652.01,3315.95) 3745.45,3257.46 ccw(c3789.41,3233.32) 3744.99,3210.02 3771.14,3164.75 ccw(c3817.03,3191.24) 3860.59,3161.07 3882.86,3215.19 ccw(c3842.52,3235.4) 3842.52,3280.52 3792.28,3280.52 ccw(c3792.28,3238.28) 3755.81,3259.59 ; 3740.66,3367.14 cw(c3652.01,3315.95) 3742.43,3363.93 ; 3740.66,3367.14 ccw(c3792.28,3393.62) 3742.44,3363.93 ; 3752.72,3254.25 ccw(c3652.01,3315.95) 3753.72,3255.91 ; 3752.72,3254.25 cw(c3789.41,3233.32) 3753.72,3255.91 ; 3752.72,3377.66 ccw(c3789.41,3398.59) 3753.72,3376 ; 3752.72,3377.66 cw(c3652.01,3315.95) 3753.72,3376 ; 3753.72,3255.91 ccw(c3652.01,3315.95) 3754.3,3256.9 ccw(c3652.01,3315.95) 3754.87,3257.89 ; 3753.72,3376 cw(c3652.01,3315.95) 3754.3,3375.01 cw(c3652.01,3315.95) 3754.87,3374.02 ; 3754.87,3257.89 ccw(c3652.01,3315.95) 3755.81,3259.59 ; 3754.87,3257.89 cw(c3792.28,3238.28) 3755.81,3259.59 ; 3754.87,3374.02 ccw(c3792.28,3393.62) 3755.81,3372.32 ; 3754.87,3374.02 cw(c3652.01,3315.95) 3755.81,3372.32 ; 3766.3,3246.26 ccw(c3652.01,3315.95) 3767.94,3249.03 ccw(c3652.01,3315.95) 3769.51,3251.83 ; 3766.3,3246.26 ccw(c3789.41,3233.32) 3766.47,3220.07 3791.59,3176.56 ccw(c3817.03,3191.24) 3841.54,3175.06 3861.68,3225.5 ccw(c3842.52,3235.4) 3840.82,3256.9 3792.28,3256.9 ccw(c3792.28,3238.28) 3776.35,3247.91 ; 3766.3,3385.65 cw(c3789.41,3398.59) 3766.47,3411.84 3791.59,3455.35 cw(c3817.03,3440.67) 3841.54,3456.85 3861.68,3406.41 cw(c3842.52,3396.51) 3840.82,3375.01 3792.28,3375.01 cw(c3792.28,3393.62) 3776.35,3383.99 ; 3766.3,3385.65 cw(c3652.01,3315.95) 3767.94,3382.88 cw(c3652.01,3315.95) 3769.51,3380.08 ; 3773.11,3242.3 ccw(c3652.01,3315.95) 3774.76,3245.09 ccw(c3652.01,3315.95) 3776.34,3247.91 ; 3773.1,3242.3 ccw(c3789.41,3233.32) 3773.29,3224.01 3797.56,3181.97 ccw(c3817.03,3191.24) 3835.18,3179.61 3854.85,3229.61 ccw(c3842.52,3235.4) 3842.52,3249.03 3792.28,3249.03 ccw(c3792.28,3238.28) 3783.16,3243.96 ; 3773.11,3389.61 cw(c3652.01,3315.95) 3774.76,3386.82 cw(c3652.01,3315.95) 3776.34,3384 ; 3773.1,3389.61 cw(c3789.41,3398.59) 3773.29,3407.9 3797.56,3449.94 cw(c3817.03,3440.67) 3835.18,3452.3 3854.85,3402.3 cw(c3842.52,3396.51) 3842.52,3382.88 3792.28,3382.88 cw(c3792.28,3393.62) 3783.16,3387.95 ; 3779.93,3393.53 ccw(c3789.41,3398.59) 3780.5,3392.59 cw(c3789.41,3398.59) 3779.93,3393.53 ; 3779.93,3393.53 cw(c3789.41,3398.59) 3780.11,3403.96 ; 3779.93,3393.53 cw(c3789.41,3398.59) 3780.11,3403.96 ; 3779.93,3393.53 cw(c3652.01,3315.95) 3781.58,3390.76 cw(c3652.01,3315.95) 3783.16,3387.95 ; 3780.11,3403.96 3805.23,3447.48 cw(c3817.03,3440.67) 3828.21,3448.45 3847.66,3399.14 3847.86,3398.64 cw(c3842.52,3396.51) 3842.52,3390.76 3792.28,3390.76 cw(c3792.28,3393.62) 3789.77,3392.23 ; 3786.95,3397.12 3788.4,3394.69 3789.77,3392.23
  Bottom Layer w10: 3759.38,2366.27 3810.4,2417.3 3810.4,2869.66
  Bottom Layer w11.81: 3652.01,3252.17 ccw(c3652.01,3315.95) 3652.01,3379.74
  other v1: 3700.67,3233.27 3605.46,3237.58 3746.89,3314.9 3558.22,3317.38 3606.27,3392.29 3700.67,3400.55
  other v3: 3603.71,2639.66 3647.01,2639.66 3603.71,2682.97 3647.01,2682.97 3647.01,2726.27 3690.32,2726.27 3603.71,2769.58 3647.01,2769.58 3690.32,2769.58 3647.01,2812.89

## Polygon pours and split planes (outlines as drawn)
no net on Mid-Layer 2 "NONET_L-01_P-001" (solid, pour order 0): 3287.01,2996.27 3277.01,2986.27 3277.01,2311.27 4022.01,2311.27 4027.01,2316.27 4022.01,2321.27 4022.01,3001.27

## Keep-outs
Keep-Out Layer:
  the board outline again, w3.94

## Other copper
Bottom Layer:
  rectangle: 3727.01,2826.27 3832.01,2906.27
  rectangle: 3797.01,2826.27 3832.01,2976.27

## Silkscreen, mask and mechanical layers (free items; w line width, h text height)
Top Overlay:
  drawing of 8 lines, arcs and shapes, not listed
  text "v5" at 3722.44,3129.3 h51.18
  text "PCBMotor" at 3550.99,3063.27 h47.24
Bottom Overlay:
  circle w13.78: c3652.01,3315.95 r314.96
  circle w13.78: c3652.01,3315.95 r314.96
Mechanical 1:
  the board outline again, w10